# EAGLE board Temperature Sensor Rev.3 (EAGLE 7.6.0)
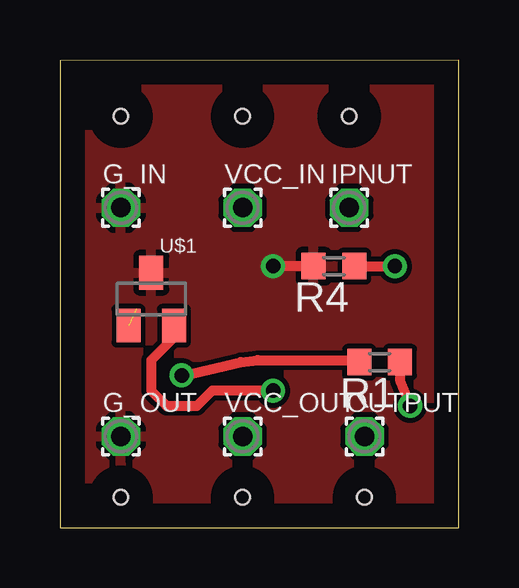
[diagram p0: board, top side]
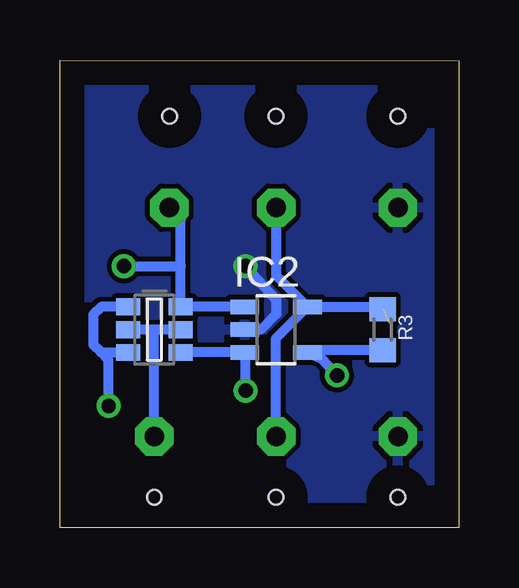
[diagram p1: board, bottom side, seen from below]

Size 16.64 x 19.49 mm. Coordinates in mm from the lower left corner, seen from the top.
Outline: 0,0 16.64,0 16.64,19.49 0,19.46 0,0
Copper layers (1*16): Top 0.035mm / dielectric 1.5mm / Bottom 0.035mm
Design rules "default": minimum track width 10mil, minimum drill 24mil, track to track 8mil, track to pad 8mil, pad to pad 8mil, via to via 8mil, smd to smd 8mil, copper to edge 40mil, drill to drill 8mil, minimum pad ring 10mil, minimum via ring 8mil, stop-mask expansion 4mil, vias tented up to drill 0mil, thermal gap 10mil
Holes 0.6 mm at 2.54,1.27 7.62,1.27 12.7,1.27 12.06,17.14 7.62,17.14 2.54,17.14

## Footprints (pad centres in the part's own frame; a part is rotated, then mirrored left to right if it is on the bottom)
SOT23-6 = smd 1 x 0.7: P$1 -1.099,0.95; P$2 -1.099,0; P$3 -1.099,-0.95; P$4 1.099,-0.95; P$5 1.099,0; P$6 1.099,0.95
1,6/0,8 = drill 0.813 pad 1.6 octagon: 1 0,0
DBV-R-PDSO-G5 = smd 0.6 x 1.2: 1 -0.95,-1.306; 2 0,-1.306; 3 0.95,-1.306; 4 0.95,1.306; 5 -0.95,1.306
R0603 = smd 1 x 1.1: 1 -0.85,0; 2 0.85,0
SOT23 = smd 1 x 1.4: 1 -0.95,-1.1; 2 0.95,-1.1; 3 0,1.1

## Placement (x,y rotation side)
_  DMG6602  [SOT23-6]  12.7,8.26 0 bottom
G_IN  [1,6/0,8]  2.54,13.34 0 top
G_OUT  [1,6/0,8]  2.54,3.81 0 top
IC2  TL331  [DBV-R-PDSO-G5]  7.62,8.26 270 bottom
IPNUT  [1,6/0,8]  12.06,13.34 0 top
OUTPUT  [1,6/0,8]  12.7,3.81 0 top
R1  [R0603]  13.34,6.9 180 top
R3  [R0603]  3.17,8.26 270 bottom
R4  [R0603]  11.43,10.9 180 top
U$1  MCP970X  [SOT23]  3.81,9.53 0 top
VCC_IN  [1,6/0,8]  7.62,13.34 0 top
VCC_OUT  [1,6/0,8]  7.62,3.81 0 top

## Library data of the parts
_ = formula electric
G_IN G_OUT IPNUT OUTPUT VCC_IN VCC_OUT = wirepad
IC2 = linear
R1 R3 R4 = resistor
U$1 = microchip

## Nets
COMP_OUT: IC2.4 R1.2 R3.2
GND: G_IN.1 G_OUT.1 IC2.2 R4.2 U$1.3
INPUT: _.P$6 IC2.1 IPNUT.1 R4.1
MOS_IN: _.P$1 _.P$3 R1.1
OUTPUT: _.P$2 _.P$5 OUTPUT.1
THERM_OUT: _.P$4 IC2.3 U$1.2
VCC: IC2.5 R3.1 U$1.1 VCC_IN.1 VCC_OUT.1

## Tracks (layer width: path | path; a pad name or v marks a point on that pad's centre or on a via)
COMP_OUT  (via drill 0.6)
  Top 0.406: v5.08,6.35 4.87,6.26 7.54,6.9 8.26,6.99 12.4,6.99 R1.2
  Bottom 0.406: R3.2 6.21,7.41 IC2.4 5.68,7.02 v5.08,6.35
GND  (via drill 0.6)
  Top 0.406: R4.2 v8.89,10.9
  Bottom 0.406: v8.89,10.9 7.62,9.53 7.62,8.89 8.26,8.26 IC2.2
  pour Top: 0,0 16.64,0 16.64,19.46 0,19.46
  pour Bottom: 0,0 16.64,0 16.64,19.46 0,19.46
INPUT  (via drill 0.6)
  Top 0.406: R4.1 v13.97,10.9
  Bottom 0.406: IC2.1 _.P$6 11.6,10.9 | 11.6,10.9 11.6,12.87 IPNUT.1 | v13.97,10.9 11.6,10.9
MOS_IN  (via drill 0.6)
  Top 0.406: R1.1 14.19,6.13 v14.61,5.08
  Bottom 0.406: _.P$1 14.93,9.21 15.24,8.89 15.24,7.62 14.93,7.3 | 14.93,7.3 _.P$3 | v14.61,5.08 14.61,6.99 14.93,7.3
OUTPUT
  Bottom 0.406: _.P$5 12.7,8.26 | 12.7,8.26 _.P$2 | OUTPUT.1 12.7,8.26
THERM_OUT  (via drill 0.6)
  Top 0.406: v8.89,5.71 6.35,5.71 5.71,5.08 4.45,5.08 3.81,5.71 3.81,6.99 4.76,7.93 U$1.2
  Bottom 0.406: _.P$4 IC2.3 8.93,5.75 v8.89,5.71
VCC  (1 unrouted)
  Bottom 0.406: VCC_IN.1 7.62,10.51 IC2.5 | IC2.5 3.27,9.21 R3.1 | VCC_OUT.1 7.62,7.9 IC2.5